# Altium PCB 60W开关电源.PcbDoc
Units mm, origin at the board's own origin, x right, y up, seen from the top; angles counter-clockwise.
Board outline 99.69 x 99.06 mm, 2 copper layers (Top Layer, Bottom Layer); 22 components, 19 nets, 62 pads, 4 vias.
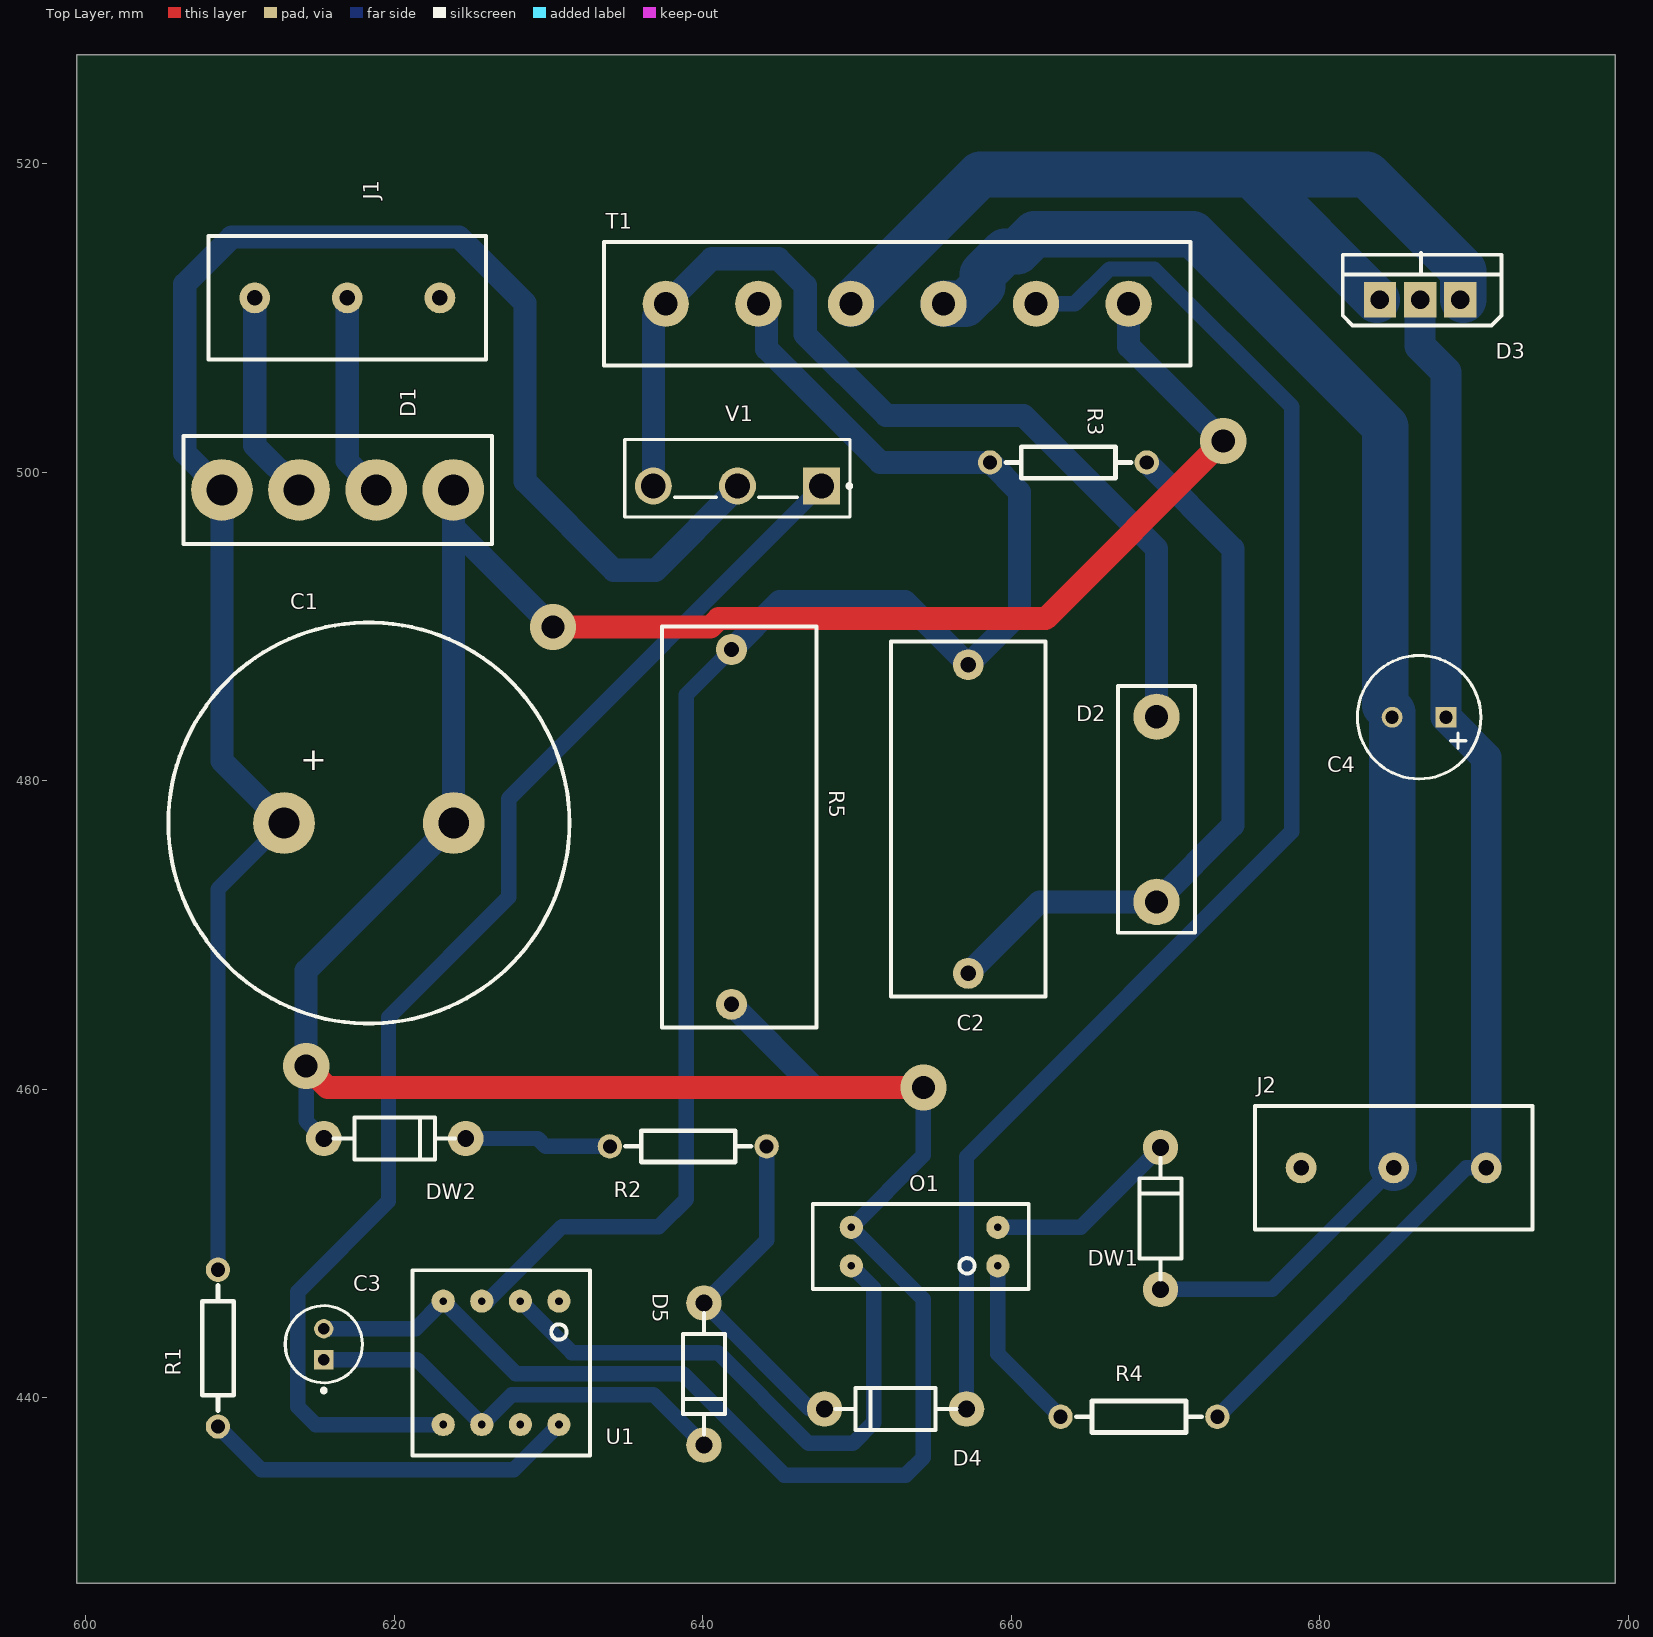
[diagram p0: Top Layer view]
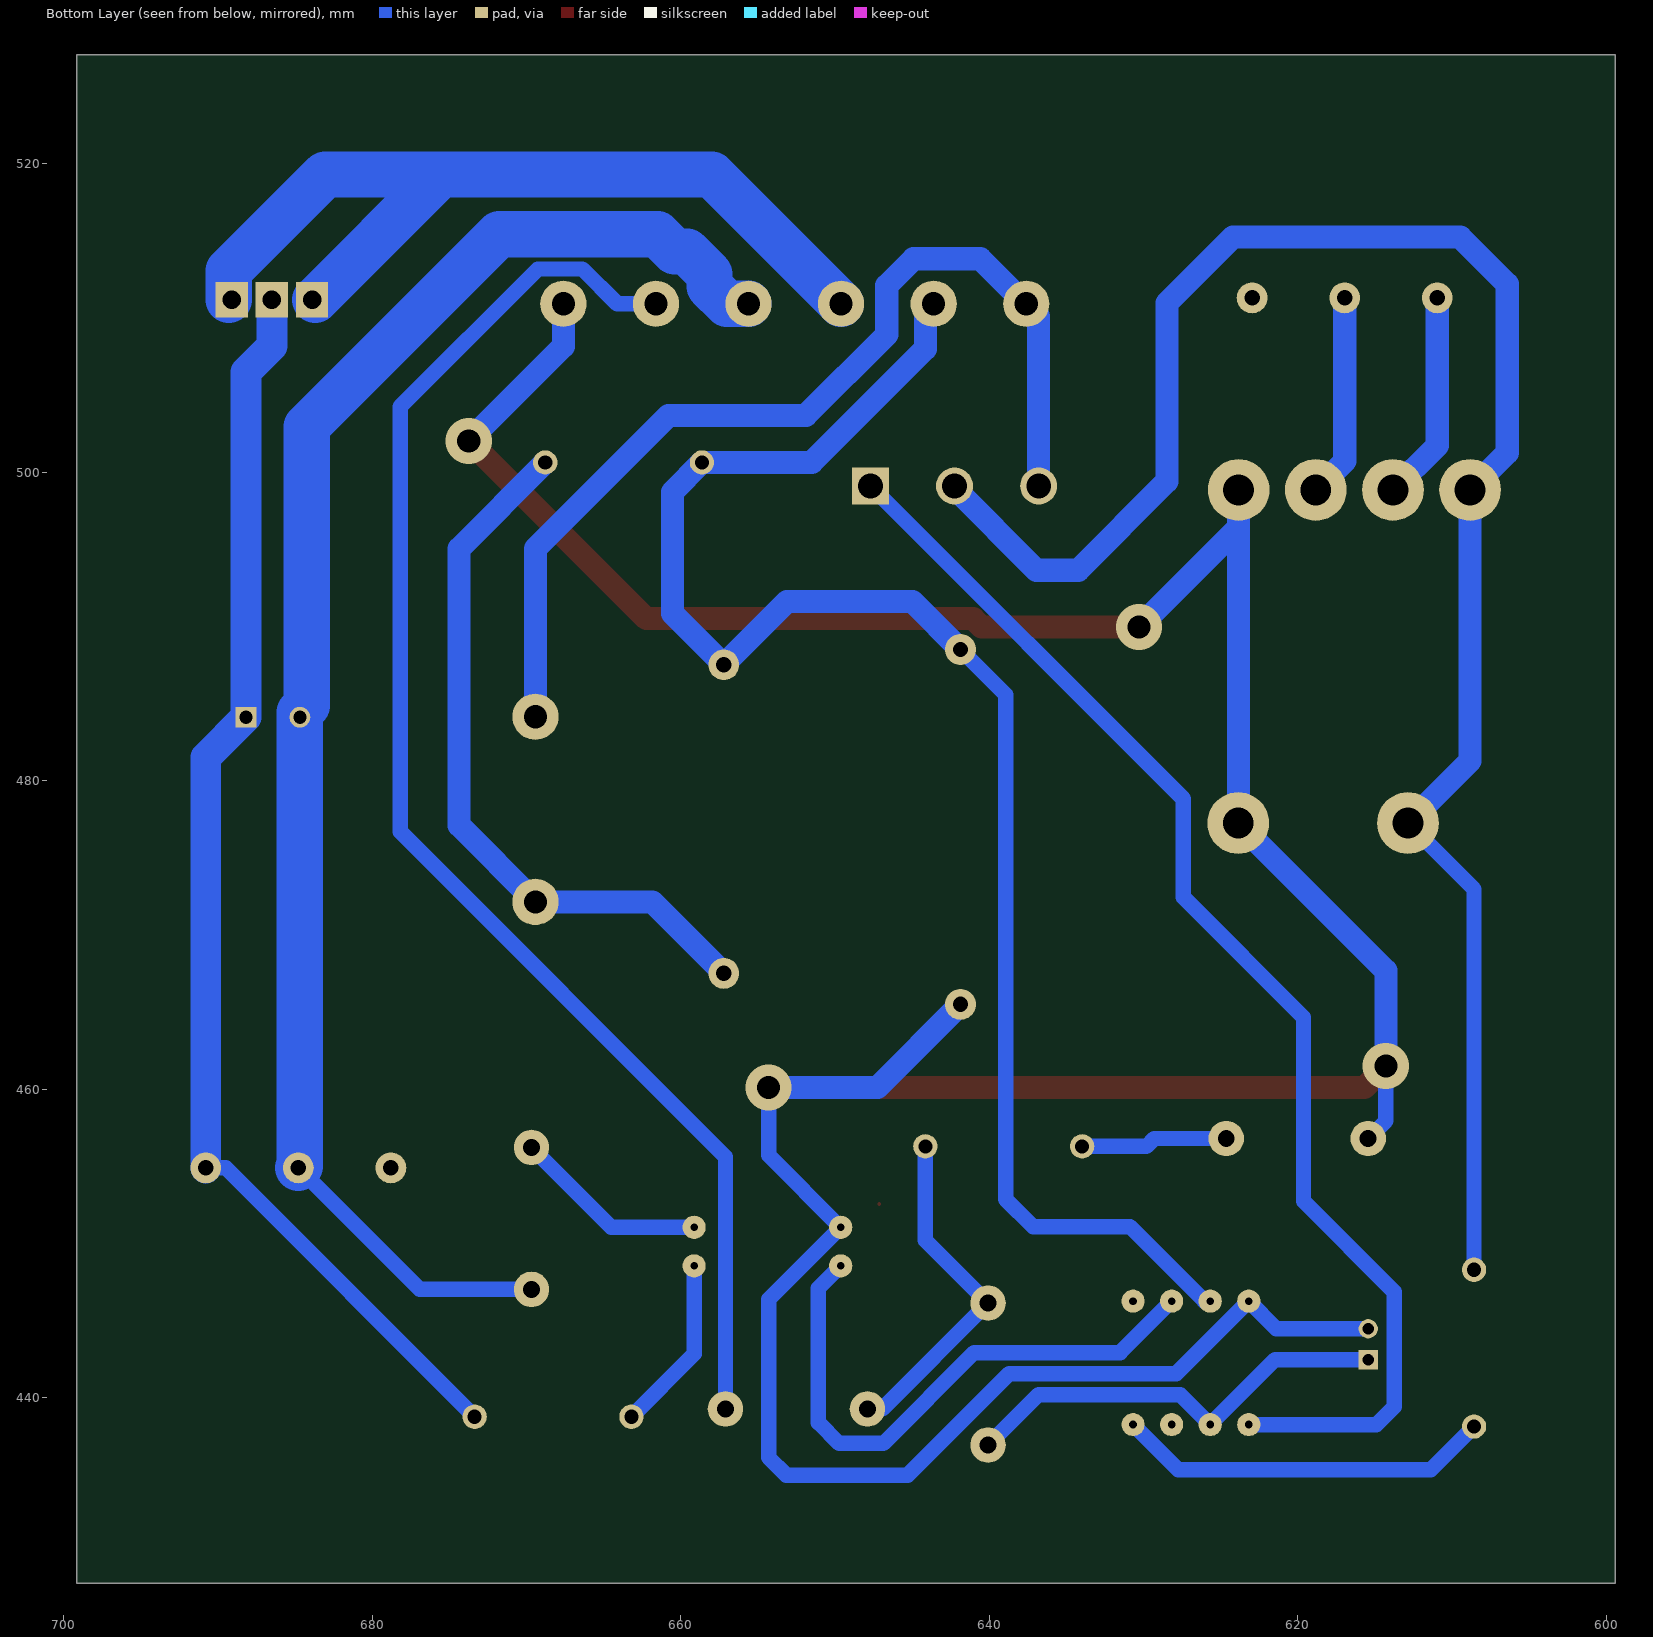
[diagram p1: Bottom Layer view, seen from below]

## Layer stack, top to bottom
Top Layer: signal copper 0.0356
Dielectric: dielectric 0.32, FR-4, Dk 4.8
Bottom Layer: signal copper 0.0356

## Board outline
599.44,527.05 699.135,527.05 699.135,427.99 599.44,427.99

## Design rules (kind name [scope] priority, off if disabled: settings)
Clearance [All] p1: gap=0.254
PolygonConnect [All] p1: connectstyle=Relief reliefconductorwidth=0.254 reliefentries=4 polygonreliefangle="90 Angle" airgapwidth=0.254
RoutingVias [All] p1: holewidth=0.711 width=1.27 viastyle="Through Hole" minholewidth=0.711 minwidth=1.27 maxholewidth=0.711 maxwidth=1.27
SolderMaskExpansion [All] p1: expansion=0.102
Width [All] p1: maxlimit=4 minlimit=0.254 preferedwidth=1
28 further rules are at their usual default settings.

## Classes and differential pairs
component class "Components Class 1": C2 C3 C4 D2 D3 D4 D5 DW1 DW2 J2 O1 R1 R2 R3 R4 R5 T1 U1 V1

## Components (designator, comment, footprint, x,y, rotation, side; value= is the part's Value field where it differs from the comment)
C1 "180uf" 180uf 618.363,477.266 r0 top
C2 "470nf" "CAP 474J" 656.209,477.52 r90 top
C3 "10uf" CAP_D5MM 615.442,443.484 r90 top
C4 "470uf" CAP_D8MM 686.435,484.124 r180 top
D1 "RS508" RS508 608.838,498.856 r0 top
D2 "1N5408" DO-27 669.417,478.155 r90 top
D3 "MBRF300100CT" mbrf30100ct 683.895,511.175 r0 top
D4 "1N5819" DO-41 657.098,439.293 r180 top
D5 "1N5819" DO-41 640.08,446.151 r270 top
DW1 "1N4742A" DO-41 669.671,447.04 r90 top
DW2 "1N4742A" do-41 615.442,456.819 r0 top
J1 "220V AC-IN" 3pin 616.966,511.302 r90 top
J2 "12V DC-OUT" 3PIN 684.784,454.914 r270 top
O1 "OPTOISO1" PC817 659.13,448.564 r180 top
R1 "1K" axial0.4 608.584,438.15 r90 top
R2 "1K" axial0.4 644.144,456.311 r180 top
R3 "10K" axial0.4 658.622,500.634 r0 top
R4 "1K" axial0.4 663.194,438.785 r0 top
R5 "0.5 5WR5J" 5wr5j 642.366,477.012 r90 top
T1 "EE42-20" ee4220 649.605,510.921 r0 top
U1 "ncp1203" NCP1203 630.682,446.278 r180 top
V1 "2SK3878" to-3p 647.7,499.11 r270 top

## Footprints (in the part's own frame and the unit in brackets; to place one, negate y for a bottom-side part, rotate by r counter-clockwise, add the part's x,y. Pads: shape width x height; smd on the part's side, far side on the other; paste and mask are expansions set on the pad)
3pin [mm]
  round 2 hole 1: 1(0,6) 2(0,0) 3(0,-6)
  silkscreen extent -4,-9 4,9
3PIN [mm]
  round 2 hole 1: 1(0,6) 2(0,0) 3(0,-6)
  silkscreen extent -4,-9 4,9
5wr5j [mm]
  round 2 hole 1: 1(-11.5,0.5) 2(11.5,0.5)
  silkscreen extent -13,-5 13,5
180uf [mm]
  round 4 hole 2: 1(-5.5,0) 2(5.5,0)
  silkscreen extent -13,-13 13,13
axial0.4 [mil]
  round 62 hole 36: 1(0,0) 2(400,0)
  silkscreen extent 40,-40 360,40, body extent -10,-34 410,34, height 84
"CAP 474J" [mm]
  round 2 hole 1: 1(-10,-1) 2(10,-1)
  silkscreen extent -11.5,-6 11.5,4
CAP_D5MM [mm]
  rect 1.25x1.25 hole 0.75: 1(-1,0)
  round 1.25 hole 0.75: 2(1,0)
  silkscreen extent -3.12,-2.5 2.5,2.5
CAP_D8MM [mm]
  rect 1.35x1.35 hole 0.85: 1(-1.75,0)
  round 1.35 hole 0.85: 2(1.75,0)
  silkscreen extent -4,-4 4,4
DO-27 [mm]
  round 3 hole 1.5: 1(-6,0) 2(6,0)
  silkscreen extent -8,-2.5 8,2.5
DO-41 [mm]
  round 2.3 hole 1.1: 1(0,0) 2(9.2,0)
  silkscreen extent 0.64,-1.36 8.51,1.36
do-41 [mm]
  round 2.3 hole 1.1: 1(0,0) 2(9.2,0)
  silkscreen extent 0.64,-1.36 8.51,1.36
ee4220 [mm]
  round 3 hole 1.5: 1(-12,0) 2(-6,0) 3(0,0) 4(6,0) 5(12,0) 6(18,0)
  silkscreen extent -16,-4 22,4
mbrf30100ct [mm]
  rect 2.1x2.3 hole 1.2: 1(0,0) 1(5.2,0) 2(2.6,0)
  silkscreen extent -2.41,-1.65 7.87,3.05
NCP1203 [mm]
  round 1.5 hole 0.5: 1(0,0) 2(2.5,0) 3(5,0) 4(7.5,0) 5(7.5,8) 6(5,8) 7(2.5,8) 8(0,8)
  silkscreen extent -2,-2 9.5,10
PC817 [mm]
  round 1.5 hole 0.5: 1(0,0) 2(0,-2.5) 3(9.5,-2.5) 4(9.5,0)
  Top Layer lines w0.254: 12,-4 12,-4
  silkscreen extent -2,-4 12,1.5
RS508 [mm]
  round 4 hole 2: 1(0,0) 2(5,0) 3(10,0) 4(15,0)
  silkscreen extent -2.5,-3.5 17.5,3.5
to-3p [mm]
  rect 2.4x2.4 hole 1.6: 1(0,0)
  round 2.4 hole 1.6: 2(0,-5.45) 3(0,-10.9)
  silkscreen extent -3,-12.75 2,1.92

## Part data
C1 C3 C4: library part "CAPACITOR POL", "Capacitor"
C2: library part CAP
D1: library part BRIDGE1
D2 D3 D4 D5: library part DIODE
DW1 DW2: library part ZENER2
J1 J2: library part CON2, "Connector"
R1 R2 R3 R4 R5: library part RES
T1: library part 变压器
V1: library part "MOSFET N"

## Via types
v1: diameter 3, hole 1.5, Top Layer to Bottom Layer, 4 vias

## Nets (pads, with @x,y where several pads share a name; then routed paths per layer and width w, separated by ;. In a path a pad name is that pad's centre, name@x,y a point inside that pad or via, vN(x,y) a via of type N, cw(c..) or ccw(c..) an arc to the next point about the centre after c; other vN are vias at no path point)
GND1: C1.2 C3.2 D1.4 DW2.1 O1.3 R5.1 T1.6 U1.4 | length 243.3
  Top Layer w1.5: v1(614.299,461.518) 615.696,460.121 625.348,460.121 644.652,460.121 v1(654.304,460.121) ; v1(630.301,489.966) 640.486,489.966 641.036,490.516 662.22,490.516 v1(673.735,502.031)
  Bottom Layer w1: v1(614.299,461.518) 614.299,457.962 DW2.1 ; C3.2 621.388,444.484 U1.4 627.881,441.579 638.708,441.579 645.287,435 653.161,435 654.304,436.143 654.304,446.39 O1.3 654.304,455.738 v1(654.304,460.121)
  Bottom Layer w1.5: v1(614.299,461.518) 614.299,467.702 C1.2 623.838,477.291 623.838,496.429 ; D1.4 623.838,496.429 ; v1(630.301,489.966) 623.838,496.429 ; R5.1 647.257,460.121 v1(654.304,460.121) ; T1.6 667.605,508.161 v1(673.735,502.031)
GND2: C4.2 DW1.1 J2.2 T1.4 | length 102.8
  Bottom Layer w1: DW1.1 676.91,447.04 J2.2
  Bottom Layer w3: T1.4 657.003,510.921 658.13,512.048 658.13,512.842 659.59,514.302 660.384,514.302 661.511,515.429 671.767,515.429 684.241,502.955 684.241,484.88 684.685,484.436 C4.2 684.685,455.013 J2.2
NetC1_1: C1.1 D1.1 R1.2 V1.2 | length 123.5
  Bottom Layer w1: R1.2 608.584,472.987 C1.1
  Bottom Layer w1.5: C1.1 608.838,481.291 D1.1 606.425,501.269 606.425,512.191 609.473,515.239 624.205,515.239 628.485,510.959 628.485,499.402 634.238,493.649 636.949,493.649 642.25,498.95 V1.2
NetC2_1: C2.1 D2.1 R3.2 | length 47
  Bottom Layer w1.5: C2.1 661.844,472.155 D2.1 674.37,477.108 674.37,495.046 R3.2
NetC2_2: C2.2 R3.1 R5.2 T1.2 U1.3 | length 107.1
  Bottom Layer w1: U1.3 626.055,446.278 630.881,451.104 637.159,451.104 638.937,452.882 638.937,485.583 R5.2
  Bottom Layer w1.5: R5.2 644.971,491.617 653.112,491.617 C2.2 660.527,490.838 660.527,498.729 R3.1 651.51,500.634 644.144,508 644.144,510.382 T1.2
NetC3_1: C3.1 D5.2 U1.6 | length 28.5
  Bottom Layer w1: C3.1 621.476,442.484 U1.6 627.627,440.223 636.808,440.223 D5.2
NetC4_1: C4.1 D3.2 J2.1 R4.2 | length 82.1
  Bottom Layer w1: R4.2 689.483,454.914 J2.1
  Bottom Layer w2: D3.2 686.495,508.194 688.185,506.504 C4.1 690.784,481.525 J2.1
NetD1_2: D1.2 J1.1 | length 13.6
  Bottom Layer w1.5: J1.1 610.966,501.728 D1.2
NetD1_3: D1.3 J1.2 | length 13.2
  Bottom Layer w1.5: J1.2 616.966,500.728 D1.3
NetD2_2: D2.2 T1.1 V1.3 | length 65.7
  Bottom Layer w1.5: V1.3 636.8,510.116 T1.1 637.667,510.921 640.588,513.842 644.906,513.842 646.649,512.099 646.649,508.924 651.891,503.682 660.781,503.682 669.417,495.046 D2.2
NetD3_1: D3.1 T1.3 | length 59.3
  Bottom Layer w2: D3.1@683.793,511.277 D3.1@683.895,511.175
  Bottom Layer w3: T1.3 657.987,519.303 675.563,519.303 ; D3.1@683.691,511.175 675.563,519.303 ; D3.1@689.299,511.175 689.299,513.052 683.048,519.303 675.563,519.303
NetD4_1: D4.1 T1.5 | length 94.9
  Bottom Layer w1: D4.1 657.098,455.625 678.18,476.707 678.18,504.251 669.256,513.175 666.369,513.175 664.115,510.921 T1.5
NetD4_2: D4.2 D5.1 R2.1 | length 22.5
  Bottom Layer w1: R2.1 644.144,450.215 D5.1 646.938,439.293 D4.2
NetDW1_2: DW1.2 O1.2 | length 12.7
  Bottom Layer w1: O1.2 664.495,451.064 DW1.2
NetDW2_2: DW2.2 R2.2 | length 9.6
  Bottom Layer w1: DW2.2 629.31,456.819 629.818,456.311 R2.2
NetO1_1: O1.1 R4.1 | length 11.5
  Bottom Layer w1: O1.1 659.13,442.849 R4.1
NetO1_4: O1.4 U1.2 | length 38
  Bottom Layer w1: U1.2 631.516,442.944 640.983,442.944 646.869,437.058 649.732,437.058 651.078,438.404 651.078,447.116 O1.4
NetR1_1: R1.1 U1.8 | length 24.5
  Bottom Layer w1: R1.1 611.378,435.356 627.76,435.356 U1.8
NetU1_5: U1.5 V1.1 | length 83.6
  Bottom Layer w1: U1.5 614.908,438.278 613.766,439.42 613.766,446.888 619.633,452.755 619.633,464.668 627.431,472.465 627.431,478.841 V1.1
pads on no net: J1.3 J2.3 U1.1 U1.7

## Text inside footprints (layer, text, board x,y; h text height)
C1: Top Overlay "+" at 613.918,480.695 h1.52